# Altium PCB Thermometer.PcbDoc
Units mm, origin at the board's own origin, x right, y up, seen from the top; angles counter-clockwise.
Board outline 16.89 x 36.96 mm, 2 copper layers (Top Layer, Bottom Layer); 13 components, 17 nets, 58 pads, 5 vias.
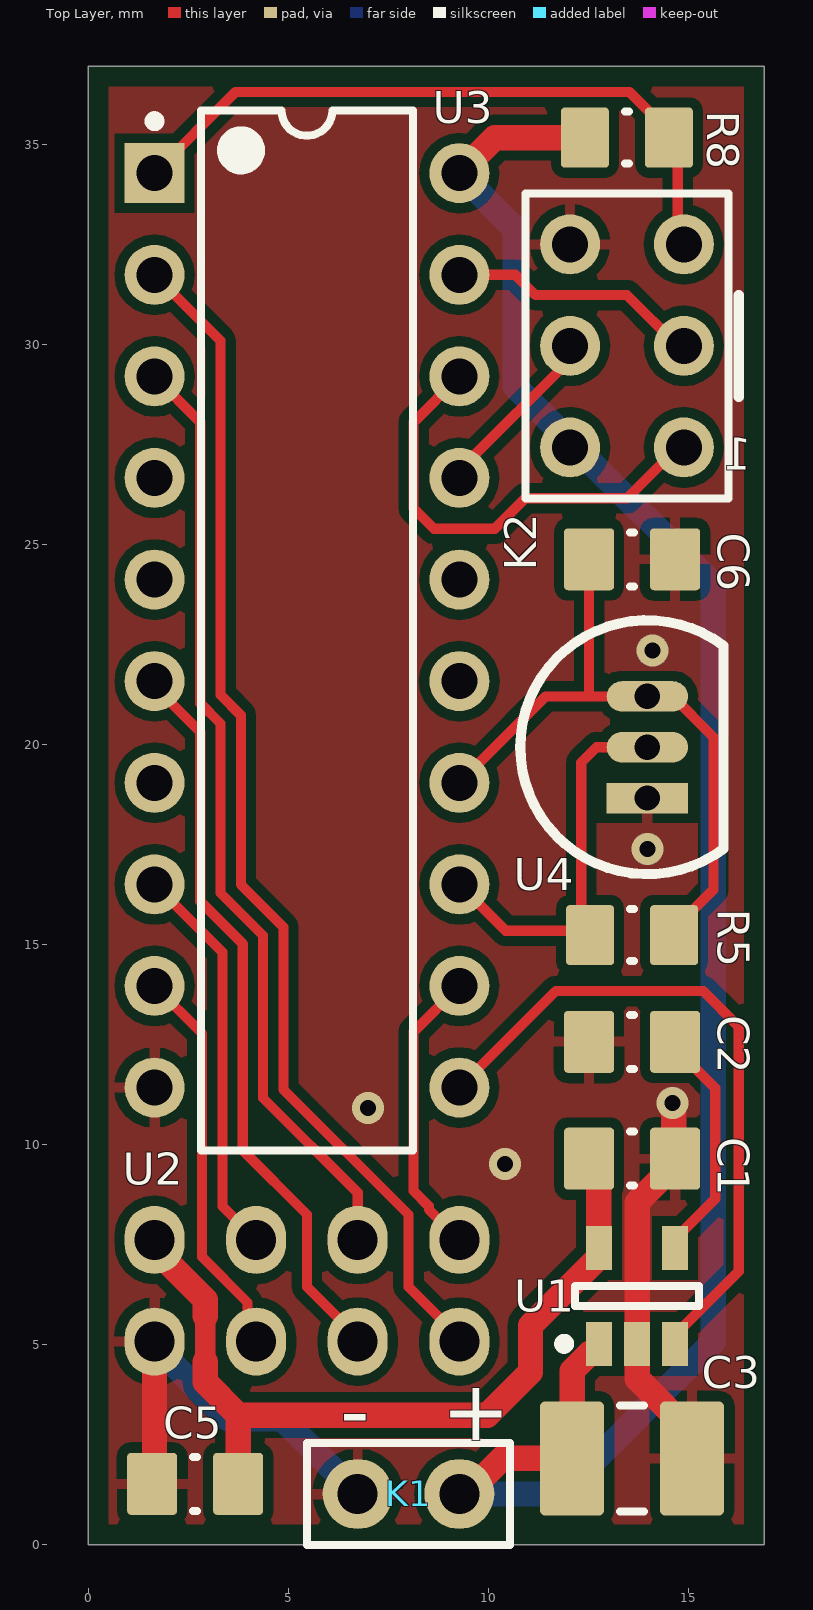
[diagram p0: Top Layer view]
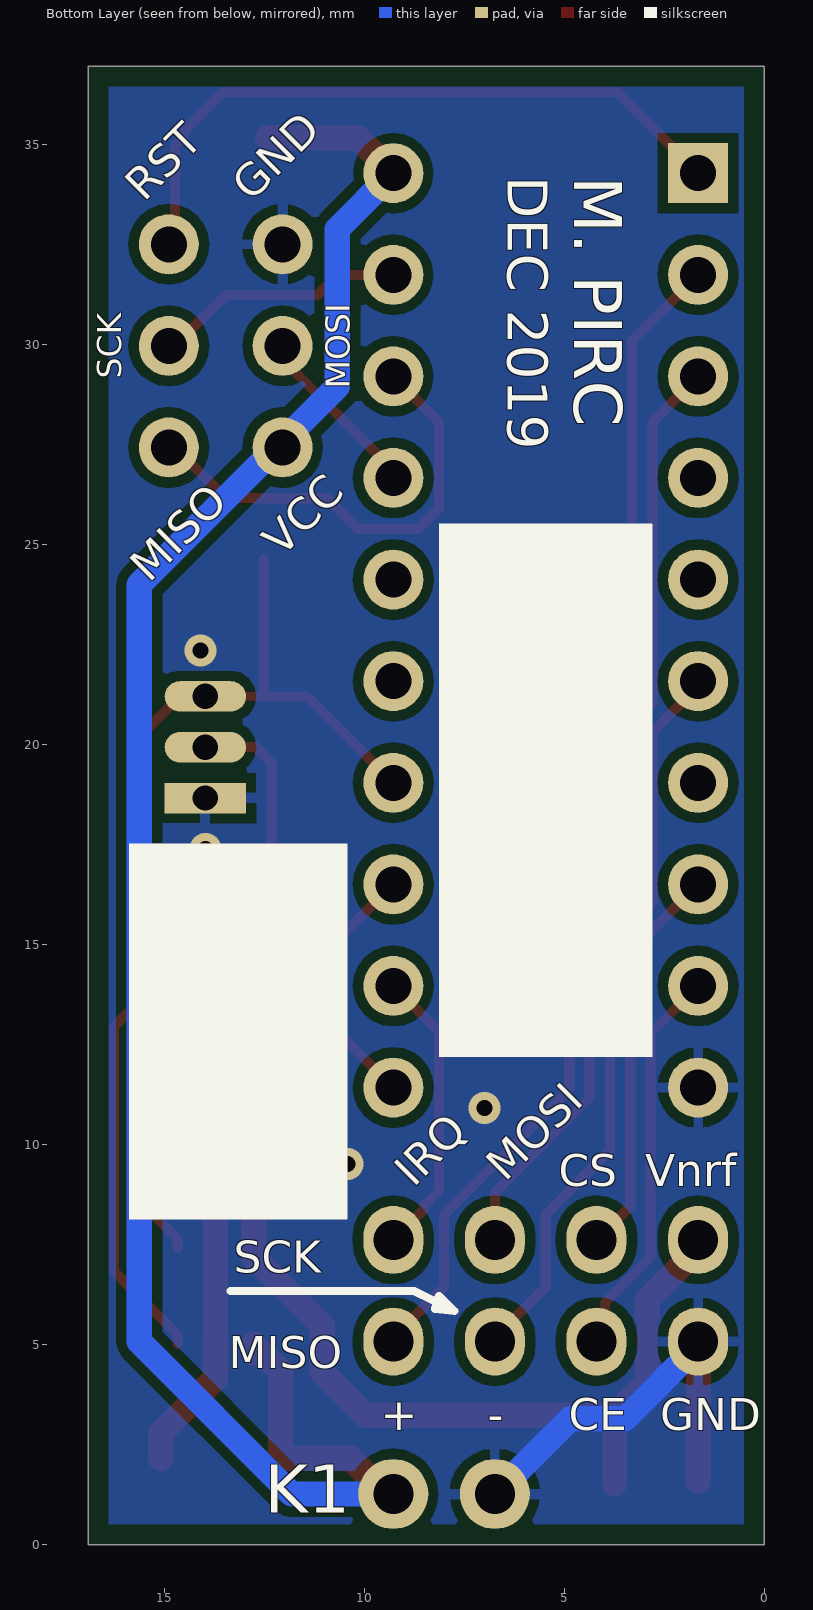
[diagram p1: Bottom Layer view, seen from below]

## Layer stack, top to bottom
Top Solder: solder mask 0.0102, Solder Resist, Dk 3.5
Top Layer: signal copper 0.0356
Dielectric 1: dielectric 0.32, FR-4, Dk 4.8
Bottom Layer: signal copper 0.0356
Bottom Solder: solder mask 0.0102, Solder Resist, Dk 3.5

## Board outline
0,0 0,36.957 16.891,36.957 16.891,0

## Design rules (kind name [scope] priority, off if disabled: settings)
BoardOutlineClearance [All] p1: gap=0.5 ignorepadtopadclearanceinfootprint=FALSE
Clearance Clearance_WOS [HasFootprint('WSON6M')] p1: gap=0.203 ignorepadtopadclearanceinfootprint=TRUE
Clearance [All] p2: gap=0.254 ignorepadtopadclearanceinfootprint=TRUE except(0: Arc-Hole Track-Hole SMDPad-Hole THPad-Hole Via-Hole Fill-Hole Poly-Hole Region-Hole Text-Hole)
PolygonConnect [All] p1: thpad.connectstyle=Relief thpad.reliefconductorwidth=0.254 thpad.reliefentries=4 thpad.polygonreliefangle="90 Angle" thpad.airgapwidth=0.254 smdpad.connectstyle=Relief smdpad.reliefconductorwidth=0.254 smdpad.reliefentries=4 smdpad.polygonreliefangle="90 Angle" smdpad.airgapwidth=0.254 via.connectstyle=Direct via.reliefconductorwidth=0.254 via.reliefentries=4 via.polygonreliefangle="90 Angle" via.airgapwidth=0.254
RoutingVias [All] p1: holewidth=0.4 width=0.8 viastyle="Through Hole" minholewidth=0.4 minwidth=0.8 maxholewidth=0.4 maxwidth=0.8
SolderMaskExpansion [All] p1: expansion=0.102 istentingtop=FALSE
Width [All] p1: maxlimit=0.635 minlimit=0.254 preferedwidth=0.254
30 further rules are at their usual default settings.

## Components (designator, comment, footprint, x,y, rotation, side; value= is the part's Value field where it differs from the comment)
C1 "1uF" C2012_0805I_M 13.589,9.652 r0 top
C2 "470pF" C2012_0805I_M 13.589,12.573 r180 top
C3 "10u" C3225_1210I_M 13.589,2.159 r0 top
C5 "100nF" C2012_0805I_M 2.667,1.524 r180 top
C6 "100nF" C2012_0805I_M 13.589,24.638 r0 top
K1 "H1x2" H1x2 9.271,1.27 r0 top
K2 "H2x3" H2x3 14.732,27.432 r270 top
R5 "10k" R2012_0805I_M 13.589,15.24 r180 top
R8 "10k" R2012_0805I_M 13.462,35.179 r0 top
U1 "TC1014-3.0VCT713" SOT-23-CT5_N 13.716,6.223 r90 top
U2 "NRF24L01+" NRF24L01+tht_module 5.461,15.24 r90 top locked
U3 "ATtiny2313-20PU" 20P3 5.461,22.86 r0 top locked
U4 "DS18B20" TO92 13.97,21.209 r0 top

## Footprints (in the part's own frame and the unit in brackets; to place one, negate y for a bottom-side part, rotate by r counter-clockwise, add the part's x,y. Pads: shape width x height; smd on the part's side, far side on the other; paste and mask are expansions set on the pad)
20P3 [mm] "DIP, 20-Pin, Row Spacing 7.62 mm, Pitch 2.54 mm"
  rect 1.5x1.5 hole 0.9: 1(-3.81,11.43)
  round 1.5 hole 0.9: 2(-3.81,8.89) 3(-3.81,6.35) 4(-3.81,3.81) 5(-3.81,1.27) 6(-3.81,-1.27) 7(-3.81,-3.81) 8(-3.81,-6.35) 9(-3.81,-8.89) 10(-3.81,-11.43) 11(3.81,-11.43) 12(3.81,-8.89) 13(3.81,-6.35) 14(3.81,-3.81) 15(3.81,-1.27) 16(3.81,1.27) 17(3.81,3.81) 18(3.81,6.35) 19(3.81,8.89) 20(3.81,11.43)
  silkscreen extent -3.93,-13 2.65,13, body extent -3.6,-12.95 3.6,12.95, height 5.34
C2012_0805I_M [mm] "Chip Capacitor, 2-Leads, Body 2.05x1.25mm, IPC Low Density"
  rrect15% 1.25x1.55 smd: 1(-1.075,0) 2(1.075,0)
  silkscreen extent -0.05,-0.68 0.05,0.67, body extent -1.1,-0.7 1.1,0.7, height 1.4
C3225_1210I_M [mm] "Chip Capacitor, 2-Leads, Body 3.20x2.50mm, IPC Low Density"
  rrect15% 1.6x2.85 smd: 1(-1.5,0) 2(1.5,0)
  silkscreen extent -0.3,-1.33 0.3,1.32, body extent -1.75,-1.37 1.75,1.38, height 2.8
H1x2 [mm]
  round 1.75 hole 1: 1(0,0) 2(-2.54,0)
  silkscreen extent -3.81,-1.27 1.27,1.27, body extent -3.81,-1.27 1.27,1.27, height 8.4
H2x3 [mm]
  round 1.5 hole 0.9: 1(0,0.152) 2(0,-2.693) 3(-2.54,0.152) 4(-2.54,-2.693) 5(-5.08,0.152) 6(-5.08,-2.693)
  silkscreen extent -6.35,-3.81 1.27,1.27, body extent -6.35,-3.81 1.27,1.27, height 8.4
NRF24L01+tht_module [mm]
  oval 1.7x1.5 hole 1: 1(-10.16,3.81) 2(-7.62,3.81) 3(-10.16,1.27) 4(-7.62,1.27) 5(-10.16,-1.27) 6(-7.62,-1.27) 7(-10.16,-3.81) 8(-7.62,-3.81)
  body extent -11.75,-9.61 17.25,5.39, height 13.21
R2012_0805I_M [mm] "Chip Resistor, 2-Leads, Body 2.05x1.25mm, IPC Low Density"
  rrect15% 1.2x1.5 smd: 1(-1.05,0) 2(1.05,0)
  silkscreen extent -0.05,-0.65 0.05,0.65, body extent -1.1,-0.7 1.1,0.7, height 0.8
SOT-23-CT5_N [mm] "SOT23, 5-Leads, Body 2.9x1.6mm, Pitch 0.95mm, Lead Span 2.7mm, IPC Medium Density"
  rect 1.1x0.65 smd: 1(-1.2,0.95) 2(-1.2,0) 3(-1.2,-0.95) 4(1.2,-0.95) 5(1.2,0.95)
  silkscreen extent -1.32,-1.55 0.25,1.95, body extent -0.9,-1.55 0.9,1.55, height 1.45
TO92 [mil]
  rect 80x30 hole 25: 1(0,-100)
  oval 80x30 hole 25: 2(0,-50) 3(0,0)
  silkscreen extent -125,-175 75,75, body extent -122,-172 67,72, height 205

## Part data
C1 C2 C3 C5 C6: library part C, "Capacitor"
K1: "Header 1x2 (male)"
K2: "Header 2x3 (male)"
R5 R8: library part R, "R"
U1: "50 mA, 100 mA and 150 mA CMOS LDOs with Active-Low Shutdown and Reference Bypass, 5-Pin SOT-23, Extended Temperature, Tape and Reel", Manufacturer=Microchip, Supplier Part Number 1=TC1014-3.0VCT713TR-ND, Code_IPC=SOT23-5, ComponentLink1Description="Manufacturer URL", ComponentLink1URL=http://www.microchip.com/, ComponentLink2Description=Datasheet, ComponentLink2URL=http://ww1.microchip.com/downloads/en/DeviceDoc/21335e.pdf, ComponentLink3Description="Package Specification", ComponentLink3URL=http://www.microchip.com/stellent/groups/techpub_sg/documents/packagingspec/en012702.pdf, DatasheetVersion="revE, Feb-2007", Mounting Technology="Surface Mount", PackageDescription="5-Lead Plastic Small Outline Transistor (CT) [SOT-23]", PackageReference=SOT-23-CT5, PackageVersion="revBB, Aug-2009", PartNumber=TC1014-3.0VCT713, Supplier 1=Digi-Key, Supplier 2=Digi-Key, Supplier 3=Digi-Key, Supplier 4=Farnell, Supplier 5=Farnell, Supplier 6=Newark, Supplier 7=Mouser, Supplier Part Number 2=TC1014-3.0VCT713CT-ND, Supplier Part Number 3=TC1014-3.0VCT713DKR-ND, Supplier Part Number 4=1331501RL, Supplier Part Number 5=1331501, Supplier Part Number 6=34M8761, Supplier Part Number 7=579-TC1014-3.0VCT713
U2: "2.4GHz low power, long range module"
U3: "Low Power tinyAVR® 8-Bit Microcontroller, 2.7-5.5V, 20MHz, 2K Flash Memory, Industrial Grade (-40°C to 85°C), 20-Lead PDIP, Pb-Free", Code_JEDEC=MS-001-AD, ComponentLink1Description="Manufacturer URL", ComponentLink1URL=http://www.atmel.com/, ComponentLink2Description="ATtiny2313 Datasheet", ComponentLink2URL=http://www.atmel.com/dyn/resources/prod_documents/doc2543.pdf, ComponentLink3Description="ATtiny2313 Summary", ComponentLink3URL=http://www.atmel.com/dyn/resources/prod_documents/doc2543S.pdf, DatasheetVersion="revL, Aug-2010", PackageDescription="20-lead (0.300\"/7.62mm Wide) Plastic Dual Inline Package (PDIP)", PackageReference=20P3, PackageVersion="revD, Oct-2010"
U4: "Temperature sensor 1-wire interface"

## Via types
v1: diameter 0.8, hole 0.4, Top Layer to Bottom Layer, 5 vias

## Nets (pads, with @x,y where several pads share a name; then routed paths per layer and width w, separated by ;. In a path a pad name is that pad's centre, name@x,y a point inside that pad or via, vN(x,y) a via of type N, cw(c..) or ccw(c..) an arc to the next point about the centre after c; other vN are vias at no path point)
BYP: C2.1 U1.4 | length 6
  Top Layer w0.254: C2.1 14.664,12.423 15.67,11.417 15.67,8.652 14.666,7.648 U1.4
CE: U2.3 U3.9 | length 9.9
  Top Layer w0.254: U3.9 2.841,12.78 2.841,7.192 3.976,6.057 3.976,5.295 U2.3
CS: U2.4 U3.8 | length 9.9
  Top Layer w0.254: U3.8 3.349,14.812 3.349,8.462 U2.4
GND: C1.2 C2.2 C3.2 C5.2 C6.2 K1.2 K2.6 U1.2 U2.1 U3.10 U4.1 | length 20.2
  Top Layer w0.254: C5.2 C5.2@1.651,1.583
  Top Layer w0.635: C5.2@1.651,1.583 U2.1 ; v1(14.605,11.049) 14.634,11.02 14.634,9.682 C1.2 14.664,9.502 13.716,8.554 U1.2 13.723,5.015 13.723,4.149 15.089,2.784 C3.2
  Bottom Layer w0.635: U2.1 1.651,4.98 3.482,3.149 4.852,3.149 K1.2
  other v1: 10.414,9.525 6.985,10.922 13.97,17.399 14.097,22.352
IRQ: U2.8 U3.12 | length 7.3
  Top Layer w0.254: U2.8 8.509,8.382 8.509,8.465 8.128,8.846 8.128,12.827 U3.12
ISP_MISO: K2.1 U3.18 | length 11.4
  Top Layer w0.254: U3.18 8.128,28.067 8.128,25.908 8.636,25.4 10.16,25.4 10.922,26.162 13.462,26.162 K2.1@14.732,27.432
ISP_MOSI: K2.4 U3.17 | length 4.5
  Top Layer w0.254: U3.17 9.271,26.86 12.192,29.781 K2.4@12.192,29.972
ISP_RST: K2.5 R8.2 U3.1 | length 17.2
  Top Layer w0.254: U3.1 3.683,36.322 13.519,36.322 14.512,35.329 R8.2 14.732,34.959 K2.5@14.732,32.512
  Bottom Layer w0.254: U3.1 U3.1@1.778,34.417
ISP_SCK: K2.3 U3.19 | length 6.2
  Top Layer w0.254: U3.19 10.668,31.75 11.176,31.242 13.462,31.242 K2.3@14.732,29.972
MISO: U2.7 U3.2 | length 29.8
  Top Layer w0.254: U3.2 3.302,30.099 3.302,21.249 3.81,20.741 3.81,16.506 4.873,15.444 4.873,11.383 8.001,8.255 8.001,6.45 9.271,5.18 U2.7
MOSI: U2.6 U3.3 | length 23.7
  Top Layer w0.254: U3.3 2.794,28.067 2.794,21.038 3.302,20.53 3.302,16.296 4.365,15.233 4.365,11.17 6.731,8.804 U2.6
NetR5_2: R5.2 U3.13 U4.2 | length 9.9
  Top Layer w0.254: U3.13 10.431,15.35 R5.2@12.429,15.35 ; R5.2@12.285,15.494 R5.2@12.319,15.46 ; R5.2 R5.2@12.429,15.35 ; U4.2 12.7,19.939 12.319,19.558 R5.2@12.319,15.46 ; R5.2@12.319,15.46 R5.2@12.429,15.35
SCK: U2.5 U3.6 | length 18.6
  Top Layer w0.254: U3.6 1.651,21.463 2.794,20.32 2.794,16.085 3.857,15.023 3.857,9.859 5.461,8.255 5.461,6.45 6.731,5.18 U2.5
SHDN: U1.3 U3.11 | length 16.9
  Top Layer w0.254: U3.11 11.684,13.843 15.367,13.843 16.256,12.954 16.256,6.838 14.666,5.248 U1.3
VBAT: C3.1 K1.1 K2.2 R8.1 U1.1 U3.20 | length 49.7
  Top Layer w0.635: K1.1 9.447,1.27 10.336,2.159 C3.1 12.089,4.346 12.533,4.79 12.758,4.79 12.766,4.798 U1.1 ; U3.20 10.16,35.179 R8.1
  Bottom Layer w0.635: K1.1 11.811,1.27 15.621,5.08 15.621,24.003 12.192,27.432 10.668,28.956 10.668,32.893 U3.20
VCC_DS: C6.1 R5.1 U3.14 U4.3 | length 16.5
  Top Layer w0.254: U3.14 11.43,21.209 12.446,21.209 ; C6.1 12.514,21.277 12.446,21.209 ; R5.1 14.639,15.39 15.621,16.372 15.621,20.193 14.605,21.209 U4.3 12.446,21.209
VCC_NRF24: C1.1 C5.1 U1.5 U2.2 | length 20.9
  Top Layer w0.508: 2.921,4.572 2.921,5.715
  Top Layer w0.635: U2.2 1.651,7.394 2.921,6.124 2.921,5.715 ; 2.921,4.572 2.921,4.064 3.742,3.243 ; C5.1 3.742,3.243 ; C1.1 12.758,9.408 12.758,7.431 U1.5 12.766,7.198 11.049,5.481 11.049,4.318 9.974,3.243 3.742,3.243
pads on no net: U3.4 U3.5 U3.7 U3.15 U3.16

## Polygon pours and split planes (outlines as drawn)
GND on Top Layer "GND-TOP" (solid, pour order 0): 0,0 16.891,0 16.891,36.957 0,36.957
GND on Bottom Layer "GND-TOP" (solid, pour order 1): 0,0 16.891,0 16.891,36.957 0,36.957

## Silkscreen, mask and mechanical layers (free items; w line width, h text height)
Top Overlay:
  lines w0.254: 16.256,28.702 16.256,31.242
  text "1" at 16.564,26.87 h0.8
  text "-" at 6.296,2.625 h1.5
  text "+" at 8.836,2.617 h1.5
Bottom Overlay:
  rectangle: 10.414,8.128 15.875,17.526
  rectangle: 2.794,12.192 8.128,25.527
  lines w0.2: 13.335,6.35 8.763,6.35 7.747,5.842 ; 7.747,5.842 8.232,5.895 8.128,6.223 7.747,5.842
  text "M. PIRC" at 4.753,34.217 h1.2 r90
  text "DEC 2019" at 6.404,34.217 h1 r90
  text "GND" at 12.827,33.557 h0.8 r315
  text "RST" at 15.494,33.557 h0.8 r315
  text "SCK" at 16.075,29.156 h0.6 r270
  text "MOSI" at 10.36,28.902 h0.6 r270
  text "VCC" at 12.065,24.667 h0.8 r315
  text "MISO" at 15.367,24.032 h0.8 r315
  text "MOSI" at 6.477,9.046 h0.8 r315
  text "Vnrf" at 2.975,8.963 h0.8
  text "CS" at 5.134,8.963 h0.8
  text "IRQ" at 8.763,8.919 h0.8 r315
  text "SCK" at 13.262,6.804 h0.8
  text "MISO" at 13.389,4.419 h0.8
  text "GND" at 2.594,2.867 h0.8
  text "CE" at 4.88,2.867 h0.8
  text "+" at 9.579,2.861 h0.8
  text "-" at 6.912,2.848 h0.8
Board Outline:
  the board outline again, w0.254